# Altium PCB Payload.PcbDoc
Units mm, origin at the board's own origin, x right, y up, seen from the top; angles counter-clockwise.
Board outline 47.6 x 56 mm, 2 copper layers (Top Layer, Bottom Layer); 18 components, 18 nets, 89 pads, 20 vias.
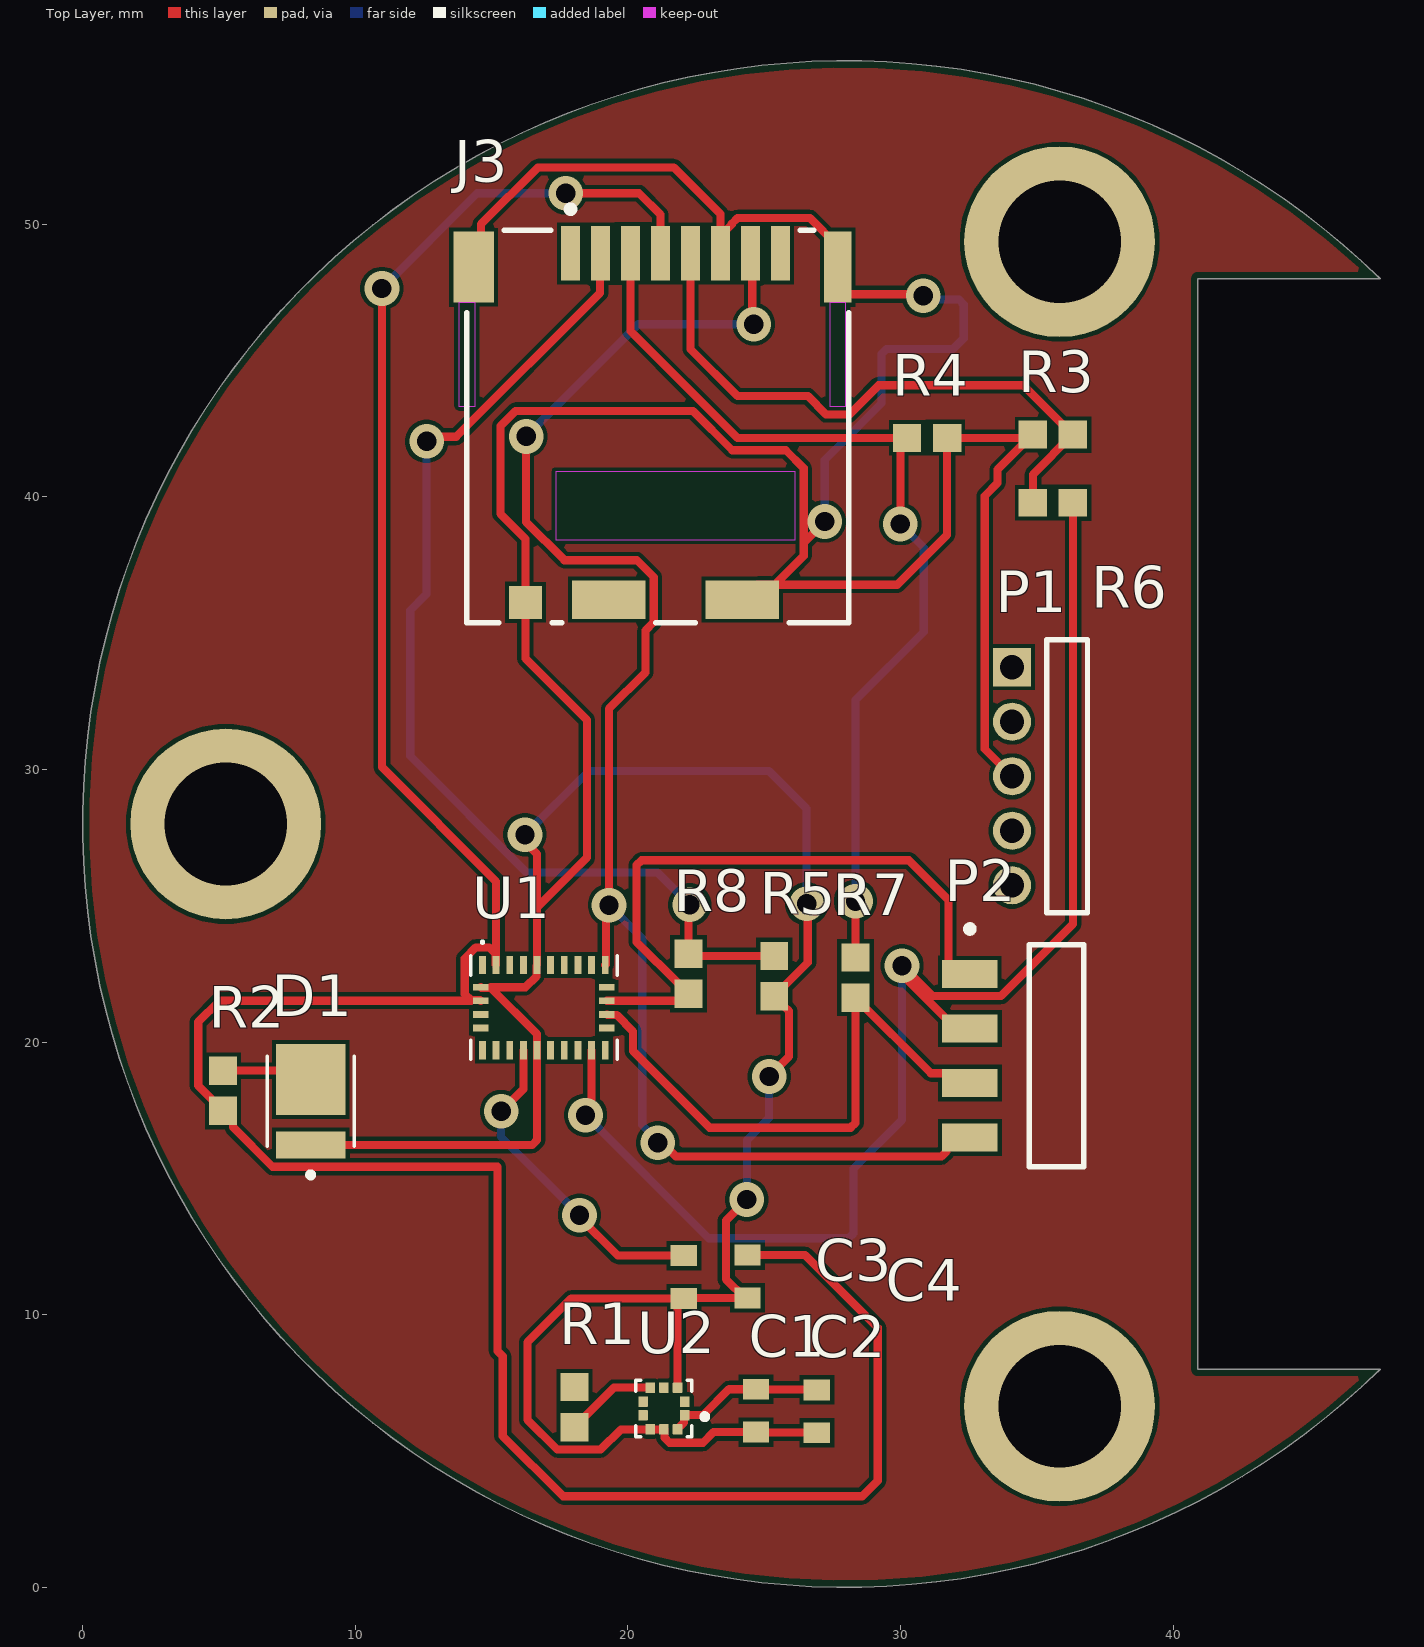
[diagram p0: Top Layer view]
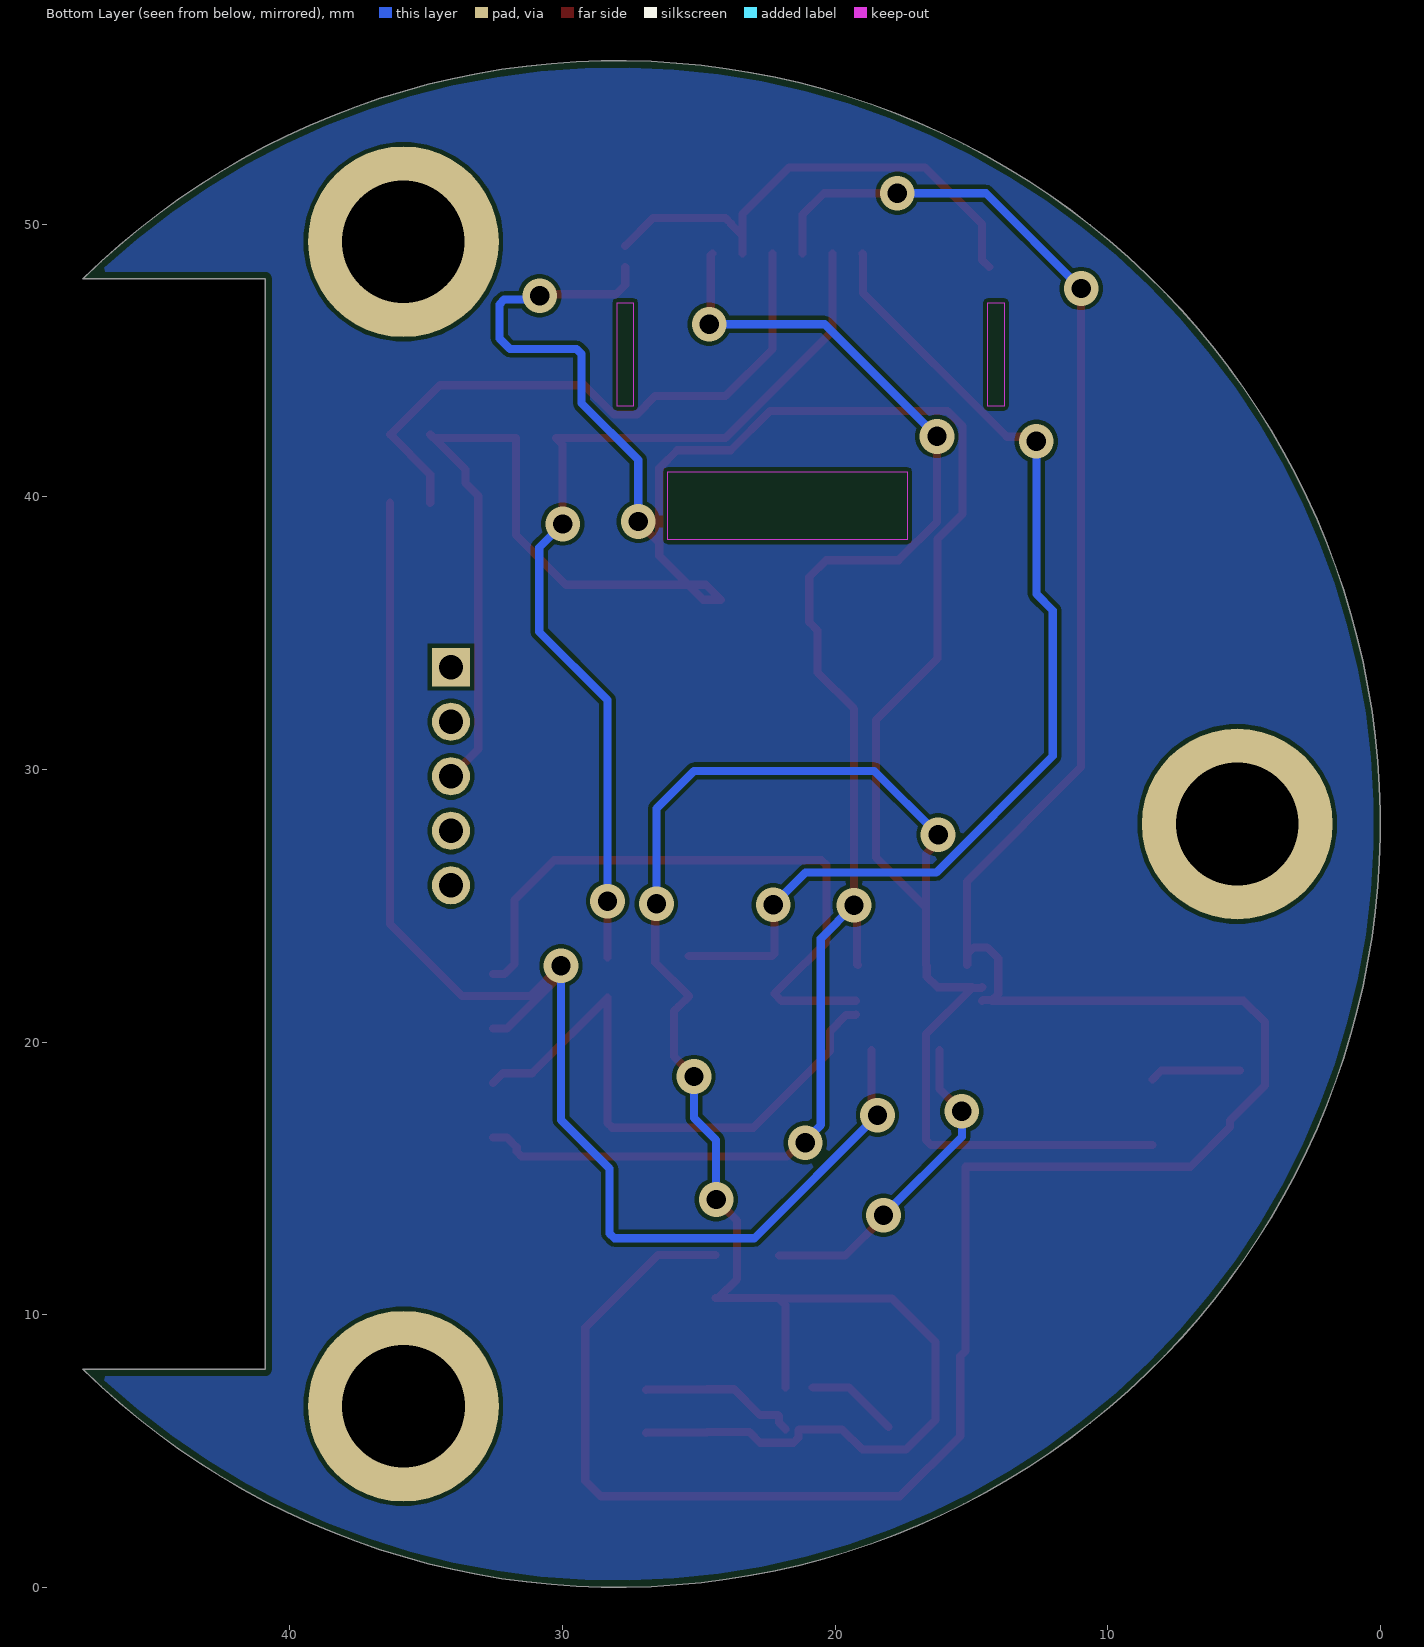
[diagram p1: Bottom Layer view, seen from below]

## Layer stack, top to bottom
Top Solder: solder mask 0.0102, Solder Resist, Dk 3.5
Top Layer: signal copper 0.0356
Dielectric 1: dielectric 0.32, FR-4, Dk 4.8
Bottom Layer: signal copper 0.0356
Bottom Solder: solder mask 0.0102, Solder Resist, Dk 3.5

## Board outline
47.596,8 cw(c28,28) 47.596,48 47.6,48 40.913,48 40.913,8

## Design rules (kind name [scope] priority, off if disabled: settings)
BoardOutlineClearance [All] p1: gap=0.254 ignorepadtopadclearanceinfootprint=FALSE except(0: Arc-SplitContinuation Track-SplitContinuation SMDPad-SplitContinuation THPad-SplitContinuation Via-SplitContinuation Fill-SplitContinuation Poly-SplitContinuation Region-SplitContinuation Text-SplitContinuation)
Clearance [All] p1: gap=0.152 ignorepadtopadclearanceinfootprint=FALSE
ComponentClearance [All] p1: gap=0.1 collisioncheckmode=3 verticalgap=0.254 showdistances=FALSE
HoleSize [All] p1: absolutevalues=TRUE maxlimit=6.2 minlimit=0.3 maxpercent=80.000 minpercent=20.000
MinimumAnnularRing [All] p1: minimumring=0.15
MinimumSolderMaskSliver [All] p1: minsoldermaskwidth=0.1
PolygonConnect ViaConnect [IsVia] p1: connectstyle=Direct reliefconductorwidth=0.254 reliefentries=4 polygonreliefangle="90 Angle" airgapwidth=0.254
PolygonConnect [All] p2: connectstyle=Relief reliefconductorwidth=0.254 reliefentries=4 polygonreliefangle="90 Angle" airgapwidth=0.254
RoutingVias [All] p1: holewidth=0.3 width=0.6 viastyle="Through Hole" minholewidth=0.3 minwidth=0.5 maxholewidth=1 maxwidth=5
SilkToSilkClearance [All] p1: silktosilkclearance=0.1
SilkToSolderMaskClearance [IsPad] p1: minsilkscreentomaskgap=0.1 clearancetoexposedcopper=TRUE
SolderMaskExpansion [All] p1: expansion=0.051 istentingtop=FALSE
SupplyNets "Schematic Supply Nets_21" [InNet('1V8')] p1: voltage=0.000
SupplyNets "Schematic Supply Nets_20" [InNet('Vbat')] p2: voltage=0.000
SupplyNets "Schematic Supply Nets_19" [InNet('5V')] p3: voltage=0.000
SupplyNets "Schematic Supply Nets_18" [InNet('UCB1_MISO/SCL')] p4: voltage=0.000
SupplyNets "Schematic Supply Nets_17" [InNet('SDI_3V')] p5: voltage=0.000
SupplyNets "Schematic Supply Nets_15" [InNet('UCB1_CLK')] p6: voltage=0.000
SupplyNets "Schematic Supply Nets_14" [InNet('BARO_CS')] p7: voltage=0.000
SupplyNets "Schematic Supply Nets_11" [InNet('UCB1_STE')] p8: voltage=0.000
SupplyNets "Schematic Supply Nets_9" [InNet('BARO_INT')] p9: voltage=0.000
SupplyNets "Schematic Supply Nets_8" [InNet('SCK_3V')] p10: voltage=0.000
SupplyNets "Schematic Supply Nets_5" [InNet('3V3')] p11: voltage=0.000
SupplyNets "Schematic Supply Nets_4" [InNet('SDO/ADR')] p12: voltage=0.000
SupplyNets "Schematic Supply Nets_3" [InNet('GND')] p13: voltage=0.000
SupplyNets "Schematic Supply Nets_1" [InNet('UCB1_MOSI/SDA')] p14: voltage=0.000
SupplyNets "Schematic Supply Nets" [InNet('3.3V')] p15: voltage=0.000
Width [All] p1: maxlimit=25.4 minlimit=0.15 preferedwidth=0.3
25 further rules are at their usual default settings.

## Components (designator, comment, footprint, x,y, rotation, side; value= is the part's Value field where it differs from the comment)
C1 "0.1uF" 0603 24.703,6.481 r270 top
C2 "0.1uF" 0603 26.932,6.454 r270 top
C3 "0.1uF" 0603 24.39,11.402 r270 top
C4 "0.1uF" 0603 22.053,11.38 r270 top
D1 "OF-SMD2835Y" LED_OF-SMD2835Y 8.363,17.829 r90 top
J3 "DM3CS-SF" FP-DM3CS-SF-MFG 21.098,42.578 r180 top
P1 "TMM-105-01-T-S-RA" SMTC-TMM-105-01-X-S-RA 34.093,33.751 r270 top
P2 "MMT-104-01-L-SH" SMTC-MMT-104-01-X-SH 35.726,19.5 r270 top
R1 "22" RESC1607X60N 18.044,6.612 r270 top
R2 "10K" RESC1607X60N 5.152,18.219 r270 top
R3 "2.2K" RESC1607X60N 35.591,42.284 r180 top
R4 "2.2K" RESC1607X60N 30.975,42.163 r0 top
R5 "2.2K" RESC1607X60N 25.369,22.421 r270 top
R6 "1K" RESC1607X60N 35.591,39.786 r180 top
R7 "1K" RESC1607X60N 28.349,22.367 r90 top
R8 "1K" RESC1607X60N 22.226,22.507 r90 top
U1 "BNO085" IC_BNO085 16.918,21.264 r0 top
U2 "BMP388" PQFN50P200X200X80-10N 21.321,6.56 r180 top

## Footprints (in the part's own frame and the unit in brackets; to place one, negate y for a bottom-side part, rotate by r counter-clockwise, add the part's x,y. Pads: shape width x height; smd on the part's side, far side on the other; paste and mask are expansions set on the pad)
0603 [mil]
  rect 30x38 smd: 1(-31,0) 2(31,0)
  body extent -31,-16 31,16, height 22
FP-DM3CS-SF-MFG [mm]
  rect 0.7x2 smd paste+0 mask+0: 1(3.2,-6.35) 2(2.1,-6.35) 3(1,-6.35) 4(-0.1,-6.35) 5(-1.2,-6.35) 6(-2.3,-6.35) 7(-3.4,-6.35) 8(-4.5,-6.35)
  rect 2.7x1.4 smd paste+0 mask+0: 9(-3.1,6.35) 10(1.8,6.35)
  rect 1.2x1.2 smd paste+0 mask+0: 11(4.85,6.45)
  rect 1x2.6 smd paste+0 mask+0: 12(-6.6,-5.85)
  rect 1.5x2.6 smd paste+0 mask+0: 13(6.75,-5.85)
  Keep-Out Layer region: -6.9,-4.55 -6.3,-4.55 -6.3,-0.75 -6.9,-0.75
  Keep-Out Layer region: 6.7,-4.55 7.3,-4.55 7.3,-0.75 6.7,-0.75
  Keep-Out Layer region: -5.049,1.65 3.751,1.65 3.751,4.15 -5.049,4.15
  silkscreen extent -7,-8.1 7,7.2, body extent -7.2,-7.45 7.6,7.3, height 0.25
IC_BNO085 [mm]
  rect 0.25x0.675 smd: 1(-2.25,1.562) 6(-2.25,-1.562) 7(-1.75,-1.562) 8(-1.25,-1.562) 9(-0.75,-1.562) 10(-0.25,-1.562) 11(0.25,-1.562) 12(0.75,-1.562) 13(1.25,-1.562) 14(1.75,-1.562) 15(2.25,-1.562) 20(2.25,1.562) 21(1.75,1.562) 22(1.25,1.562) 23(0.75,1.562) 24(0.25,1.562) 25(-0.25,1.562) 26(-0.75,1.562) 27(-1.25,1.562) 28(-1.75,1.562)
  rect 0.575x0.25 smd: 2(-2.312,0.75) 3(-2.312,0.25) 4(-2.312,-0.25) 5(-2.312,-0.75) 16(2.312,-0.75) 17(2.312,-0.25) 18(2.312,0.25) 19(2.312,0.75)
  silkscreen extent -2.69,-1.9 2.69,2.45, body extent -2.6,-1.9 2.6,1.9, height 1.18
LED_OF-SMD2835Y [mm]
  rect 2.6x2.55 smd: A(0.8,0)
  rect 1x2.55 smd: C(-1.6,0)
  silkscreen extent -2.8,-1.6 1.65,1.6
PQFN50P200X200X80-10N [mm]
  rrect9% 0.35x0.38 smd: 1(-0.765,0.25) 2(-0.765,-0.25) 3(-0.5,-0.765) 4(0,-0.765) 5(0.5,-0.765) 6(0.765,-0.25) 7(0.765,0.25) 8(0.5,0.765) 9(0,0.765) 10(-0.5,0.765)
  silkscreen extent -1.6,-1.03 1.03,1.03
RESC1607X60N [mm]
  rect 1.04x1.02 smd: 1(-0.735,0) 2(0.735,0)
  body extent -0.8,-0.4 0.8,0.4, height 0.55
SMTC-MMT-104-01-X-SH [mm] "Terminal Surface Mount Strip ASSEM, 1x4 Pins, Horizontal, 2mm Pitch, Male"
  rect 1.02x2.03 smd: 1(-3,-3.181) 2(-1,-3.181) 3(1,-3.181) 4(3,-3.181)
  silkscreen extent -4.77,-3.31 4.06,0.99, body extent -4,-3.8 4,4.19, height 1.92
SMTC-TMM-105-01-X-S-RA [mm] "Terminal Strip Assembly, 1x5 Pins, Right Angle, 2mm Pitch, Male"
  rect 1.4x1.4 hole 0.89: 1(0,0)
  round 1.4 hole 0.89: 2(2,0) 3(4,0) 4(6,0) 5(8,0)
  silkscreen extent -1,1.27 9,2.77, body extent -1,-0.25 9,5.97, height 1.98

## Part data
C1 C2 C3 C4: library part C0603, "0 Ohms Jumper 0.1W, 1/10W Chip Resistor 0603 (1608 Metric) Moisture Resistant Thick Film", Package="0603 General Cable", Check_prices=https://www.snapeda.com/parts/C0603/Yageo/view-part/?ref=eda, MF=Yageo, MP=C0603, SnapEDA_Link=https://www.snapeda.com/parts/C0603/Yageo/view-part/?ref=snap
D1: "LED; SMD; 2835, PLCC2; yellow; 2200-2800mcd; 2.8x3.5x0.75mm; 120Â°", Package=None, Availability=Unavailable, MP=OF-SMD2835Y, Price=None
J3: library part CMP-11597-000003-1, "CONN MICRO SD CARD HINGED TYPE", Contact Resistance=100mR, Current Rating=500mA, Flammability Rating="UL94 V-0", Insulation Resistance=1GR, Max Operating Temperature=85°C, Min Operating Temperature=-25°C, Package Quantity=1, Voltage Rating (AC)=125V, Connector Type=Connector, Contact Material=Gold, Contact Plating=Gold, Depth=1.83mm, Gender=Female, Housing Material=Polymer, Lead Free="Lead Free", Length=14.1mm, Max Current Rating=500mA, Mount="Surface Mount", Number of Contacts=8, Number of Positions=8, Number of Rows=1, Orientation="Right Angle", Packaging="Tape and Reel", Pitch=1.1mm, Radiation Hardening=No, Termination=Solder, Width=13.8mm
P1: library part CMP-1029-00184-1, "Low Profile Through-Hole Header, Right Angle, -55 to 105 degC, 2 mm Pitch, 5-Pin, Male, RoHS", Manufacturer=Samtec, Temperature Range="-55 to 105 degC", ComponentLink1Description="Manufacturer URL", ComponentLink1URL=http://www.samtec.com, ComponentLink2Description=Datasheet, ComponentLink2URL=http://d2a072wq521u33.cloudfront.net/catalog_english//TMM_TH.PDF, ComponentLink3Description="Package Specification", ComponentLink3URL=http://www.samtec.com/documents/webfiles/cpdf/TMM-1XX-XX-XX-X-RA-XXX-MKT.pdf, DatasheetVersion=F-214, Mounting Technology=Through-hole, Orientation="Right Angle", PackageDescription="2 mm Terminal Strip Assembly (R/A)", PackageReference=TMM-105-01-X-S-RA, PackageVersion="V, 3/2013", PartNumber=TMM-105-01-T-S-RA, Pitch="2 mm", RoHS=True
P2: library part CMP-1029-00050-1, "Horizontal Surface Mount Header, -55 to 125 degC, 2 mm Pitch, 4-Pin, Male, RoHS", Manufacturer=Samtec, Temperature Range="-55 to 125 degC", ComponentLink1Description="Manufacturer URL", ComponentLink1URL=http://www.samtec.com, ComponentLink2Description=Datasheet, ComponentLink2URL=http://d2a072wq521u33.cloudfront.net/catalog_english//MMT_SM.PDF, ComponentLink3Description="Package Specification", ComponentLink3URL=http://www.samtec.com/documents/webfiles/cpdf/MMT-1XX-XX-XX-XX-XX-XXX-X-XX-MKT.pdf, DatasheetVersion=F-214, Mounting Technology="Surface Mount", Orientation=Horizontal, PackageDescription="2mm Horizontal Terminal Surface Mount Strip ASSEM", PackageReference=MMT-104-01-X-SH, PackageVersion="CY, 12/2000", PartNumber=MMT-104-01-L-SH, Pitch="2 mm", RoHS=True
R1 R2 R3 R4 R5 R6 R7 R8: library part RC0603JR-070RL, "0 Ohms Jumper 0.1W, 1/10W Chip Resistor 0603 (1608 Metric) Moisture Resistant Thick Film", Package="0603 Yageo", Check_prices=https://www.snapeda.com/parts/RC0603JR-070RL/Yageo/view-part/?ref=eda, MF=Yageo, MP=RC0603JR-070RL, SnapEDA_Link=https://www.snapeda.com/parts/RC0603JR-070RL/Yageo/view-part/?ref=snap
U1: "Accelerometer, Gyroscope, Magnetometer, 9 Axis Sensor IÂ²C, SPI, UART Output", Package="TFLGA-28 Hillcrest Laboratories", Check_prices=https://www.snapeda.com/parts/BNO085/Hillcrest+Laboratories%252C+Inc./view-part/?ref=eda, MF="Hillcrest Laboratories,", MP=BNO085, SnapEDA_Link=https://www.snapeda.com/parts/BNO085/Hillcrest+Laboratories%252C+Inc./view-part/?ref=snap
U2: "P-Sensor SPI I2C 1, 25 Bar SMD", Package=None, Availability=Unavailable, MP=BMP388, Price=None

## Free pads (board coordinates)
  round 7 hole 4.5: 1(5.25,28) 1(35.837,6.643) 1(35.837,49.357)

## Via types
v1: diameter 1.27, hole 0.711, Top Layer to Bottom Layer, 20 vias

## Nets (pads, with @x,y where several pads share a name; then routed paths per layer and width w, separated by ;. In a path a pad name is that pad's centre, name@x,y a point inside that pad or via, vN(x,y) a via of type N, cw(c..) or ccw(c..) an arc to the next point about the centre after c; other vN are vias at no path point)
3.3V: C1.1 C2.1 U2.1 U2.10 | length 5.9
  Top Layer w0.3: U2.10 21.821,5.81 22.061,6.05 22.061,6.285 U2.1 22.094,6.317 22.765,6.317 23.716,7.268 C1.1 24.717,7.255 26.918,7.255 C2.1
3V3: C3.1 J3.4 R2.2 U1.3 U1.28 | length 105.1
  Top Layer w0.3: v1(10.979,47.643) 10.979,30.085 15.168,25.896 U1.28 15.143,22.852 15.143,23.242 14.918,23.467 14.418,23.467 14.015,23.065 14.015,21.764 14.24,21.539 14.58,21.539 U1.3 ; 14.24,21.514 5.017,21.514 4.238,20.735 4.238,18.408 5.152,17.494 R2.2 5.512,17.124 5.512,16.878 6.963,15.427 15.214,15.427 15.214,8.673 15.408,8.479 15.408,5.555 17.62,3.343 28.6,3.343 29.164,3.907 29.164,9.525 26.5,12.189 C3.1 ; v1(17.718,51.137) 20.414,51.137 21.198,50.354 J3.4
  Bottom Layer w0.3: v1(10.979,47.643) 14.472,51.137 v1(17.718,51.137)
BARO_CS: U2.6
BARO_INT: U2.7
GND: C1.2 C2.2 C3.2 C4.2 D1.C J3.6 J3.9 J3.11 J3.12 J3.13 P1.3 R3.2 R4.2 R5.2 U1.2 U1.10 U1.25 U2.3 U2.8 U2.9 | length 184.7
  Top Layer w0.3: D1.C 16.492,16.229 16.668,16.405 U1.10 16.668,20.292 14.97,21.989 14.63,21.989 U1.2 ; J3.13 14.612,48.693 14.612,50.002 16.697,52.087 21.686,52.087 23.398,50.376 J3.6@23.398,49.578 ; 14.97,22.014 16.245,22.014 16.643,22.412 16.643,22.802 U1.25 16.668,24.93 ; v1(16.225,27.609) 16.225,27.347 16.668,26.904 16.668,24.93 ; U2.3 21.821,10.361 C4.2 17.92,10.592 16.319,8.991 16.319,6.144 17.409,5.055 19.003,5.055 19.743,5.795 U2.8 U2.9 21.344,5.772 21.344,5.489 21.53,5.302 22.755,5.302 23.146,5.694 C1.2 24.717,5.68 26.918,5.68 C2.2 ; C4.2 22.071,10.61 C3.2@24.387,10.61 ; J3.6 J3.6@23.398,49.578 ; C3.2@24.293,10.61 23.605,11.298 23.605,13.451 24.367,14.213 v1(24.367,14.224) ; v1(25.18,18.738) 25.91,19.468 25.91,21.14 25.735,21.316 25.729,21.316 25.369,21.676 R5.2 25.369,21.696 26.598,22.925 26.598,25.027 v1(26.555,25.07) ; 26.449,38.303 27.221,39.074 v1(27.221,39.097) ; J3.12 27.698,47.78 28.048,47.43 30.782,47.43 v1(30.839,47.373) ; J3.12@27.698,49.211 26.679,50.23 24.022,50.23 23.81,50.018 23.81,49.991 J3.6@23.398,49.578 ; P1.3 33.09,30.753 33.09,40.037 33.563,40.51 33.563,41.002 34.846,42.284 R3.2 34.734,42.163 R4.2 31.71,38.605 29.884,36.778 24.748,36.778 J3.9 24.848,36.228 26.449,37.83 26.449,41.053 25.792,41.711 23.83,41.711 22.387,43.154 15.877,43.154 15.328,42.605 15.328,39.379 16.248,38.46 J3.11 16.248,34.068 18.503,31.812 18.503,26.765 16.668,24.93
  Bottom Layer w0.3: v1(16.225,27.609) 18.565,29.949 25.178,29.949 26.555,28.571 v1(26.555,25.07) ; v1(24.367,14.224) 24.367,16.406 25.18,17.218 v1(25.18,18.738) ; v1(27.221,39.097) 27.221,41.349 29.307,43.435 29.307,45.248 29.483,45.424 31.93,45.424 32.318,45.811 32.318,47.06 32.142,47.235 30.977,47.235 v1(30.839,47.373)
NetC4_1: C4.1 U1.9 | length 12.1
  Top Layer w0.3: v1(15.352,17.458) 16.168,18.273 U1.9 ; v1(18.226,13.654) 18.226,13.571 19.629,12.167 C4.1
  Bottom Layer w0.3: v1(15.352,17.458) 15.352,16.527 v1(18.226,13.654)
NetD1_A: D1.A R2.1 | length 3.3
  Top Layer w0.3: R2.1 8.038,18.954 D1.A
NetJ3_2: J3.2 R5.1 R8.2 | length 39.4
  Top Layer w0.3: v1(12.618,42.033) 12.789,42.205 13.703,42.205 18.976,47.478 18.976,48.906 J3.2 ; v1(22.273,25.034) 22.226,24.988 R8.2 22.312,23.156 R5.1
  Bottom Layer w0.3: v1(12.618,42.033) 12.618,36.431 12.017,35.831 12.017,30.492 16.288,26.221 21.086,26.221 v1(22.273,25.034)
NetJ3_3: J3.3 R4.1 R7.2 | length 35.2
  Top Layer w0.3: J3.3 20.098,46.083 24.017,42.163 R4.1 29.996,41.919 v1(29.996,39.004) ; R7.2 v1(28.349,25.171)
  Bottom Layer w0.3: v1(28.349,25.171) 28.349,32.545 30.855,35.05 30.855,38.146 v1(29.996,39.004)
NetJ3_5: J3.5 R3.1 R6.2 | length 22.8
  Top Layer w0.3: J3.5 22.298,45.415 24.018,43.695 26.603,43.695 27.272,43.026 28.123,43.026 29.19,44.093 34.507,44.093 R3.1@36.316,42.284 ; R6.2 34.856,40.824 R3.1@36.316,42.284 ; R3.1 R3.1@36.316,42.284
NetR1_2: R1.2 U2.5 | length 3.4
  Top Layer w0.3: R1.2 18.044,5.887 18.404,6.247 18.414,6.247 19.492,7.325 U2.5
SCK_3V: U2.2
SDI_3V: U2.4
SDO/ADR: R1.1
UCB1_CLK: P2.2 R6.1 U1.14 | length 51.7
  Top Layer w0.3: v1(18.447,17.321) 18.668,17.542 U1.14 ; P2.2 32.041,20.5 30.242,22.298 30.242,22.616 v1(30.057,22.802) 31.171,21.687 33.686,21.687 36.326,24.327 R6.1
  Bottom Layer w0.3: v1(18.447,17.321) 22.965,12.803 28.098,12.803 28.274,12.979 28.274,15.36 30.057,17.143 v1(30.057,22.802)
UCB1_MISO/SCL: J3.7 P2.4 U1.20 | length 57.8
  Top Layer w0.3: v1(16.266,42.216) 16.266,39.082 17.669,37.678 20.325,37.678 20.95,37.053 20.95,35.403 20.642,35.095 20.642,33.562 19.309,32.229 v1(19.309,25.023) 19.193,24.906 19.193,22.852 U1.20 ; v1(21.099,16.304) 21.262,16.304 21.759,15.807 31.505,15.807 31.681,15.982 31.681,16.14 32.041,16.5 P2.4 ; J3.7 24.561,48.865 24.561,46.393 v1(24.624,46.33)
  Bottom Layer w0.3: v1(16.266,42.216) 20.379,46.33 v1(24.624,46.33) ; v1(19.309,25.023) 20.527,23.805 20.527,16.965 21.099,16.393 v1(21.099,16.304)
UCB1_MOSI/SDA: P2.3 R7.1 U1.17 | length 21.4
  Top Layer w0.3: U1.17 19.255,20.989 19.595,20.989 20.191,20.394 20.191,19.667 22.999,16.859 28.173,16.859 28.349,17.035 R7.1 ; R7.1@28.349,21.622 31.111,18.86 32.186,18.86 P2.3
UCB1_STE: P2.1 R8.1 U1.18 | length 24
  Top Layer w0.3: U1.18 21.968,21.514 R8.1 22.226,21.782 21.866,22.142 21.856,22.142 20.322,23.677 20.322,26.492 20.497,26.667 30.317,26.667 31.765,25.219 31.765,22.86 32.125,22.5 P2.1
pads on no net: J3.1 J3.8 J3.10 P1.1 P1.2 P1.4 P1.5 U1.1 U1.4 U1.5 U1.6 U1.7 U1.8 U1.11 U1.12 U1.13 U1.15 U1.16 U1.19 U1.21 U1.22 U1.23 U1.24 U1.26 U1.27

## Polygon pours and split planes (outlines as drawn)
no net on Top Layer "NONET_L01_P003" (solid, pour order 3): 0.559,57.167 2.604,59.212 47.322,59.212 47.322,0.864 48.186,0 0,0 0,53.485 0,53.486
no net on Bottom Layer "NONET_L02_P005" (solid, pour order 5): 0,0 0,63.074 1.727,61.348 53.457,61.348 53.457,2.727 50.73,0

## Silkscreen, mask and mechanical layers (free items; w line width, h text height)
3D Models:
  text "This is an example payload" at 18.316,60.325 h1.52
  text "Feel free to use this as template" at 16.909,58.456 h1.52
  text "Battery cutout" at 46.173,24.284 h1.52 r90
Board Outline:
  the board outline again, w0.1
Courtyard:
  lines w0.254: 41.46,9.025 41.46,47.025 49.46,47.025 49.46,9.025 41.46,9.025